# Altium PCB pcb big.PcbDoc (part 3 of 5)
Units mil, origin at the board's own origin, x right, y up, seen from the top; angles counter-clockwise.
Board outline 4068 x 10796 mil, 6 copper layers (TopLayer, MidLayer1, MidLayer2, MidLayer3, MidLayer4, BottomLayer); 521 components, 260 nets, 1284 pads, 1180 vias.
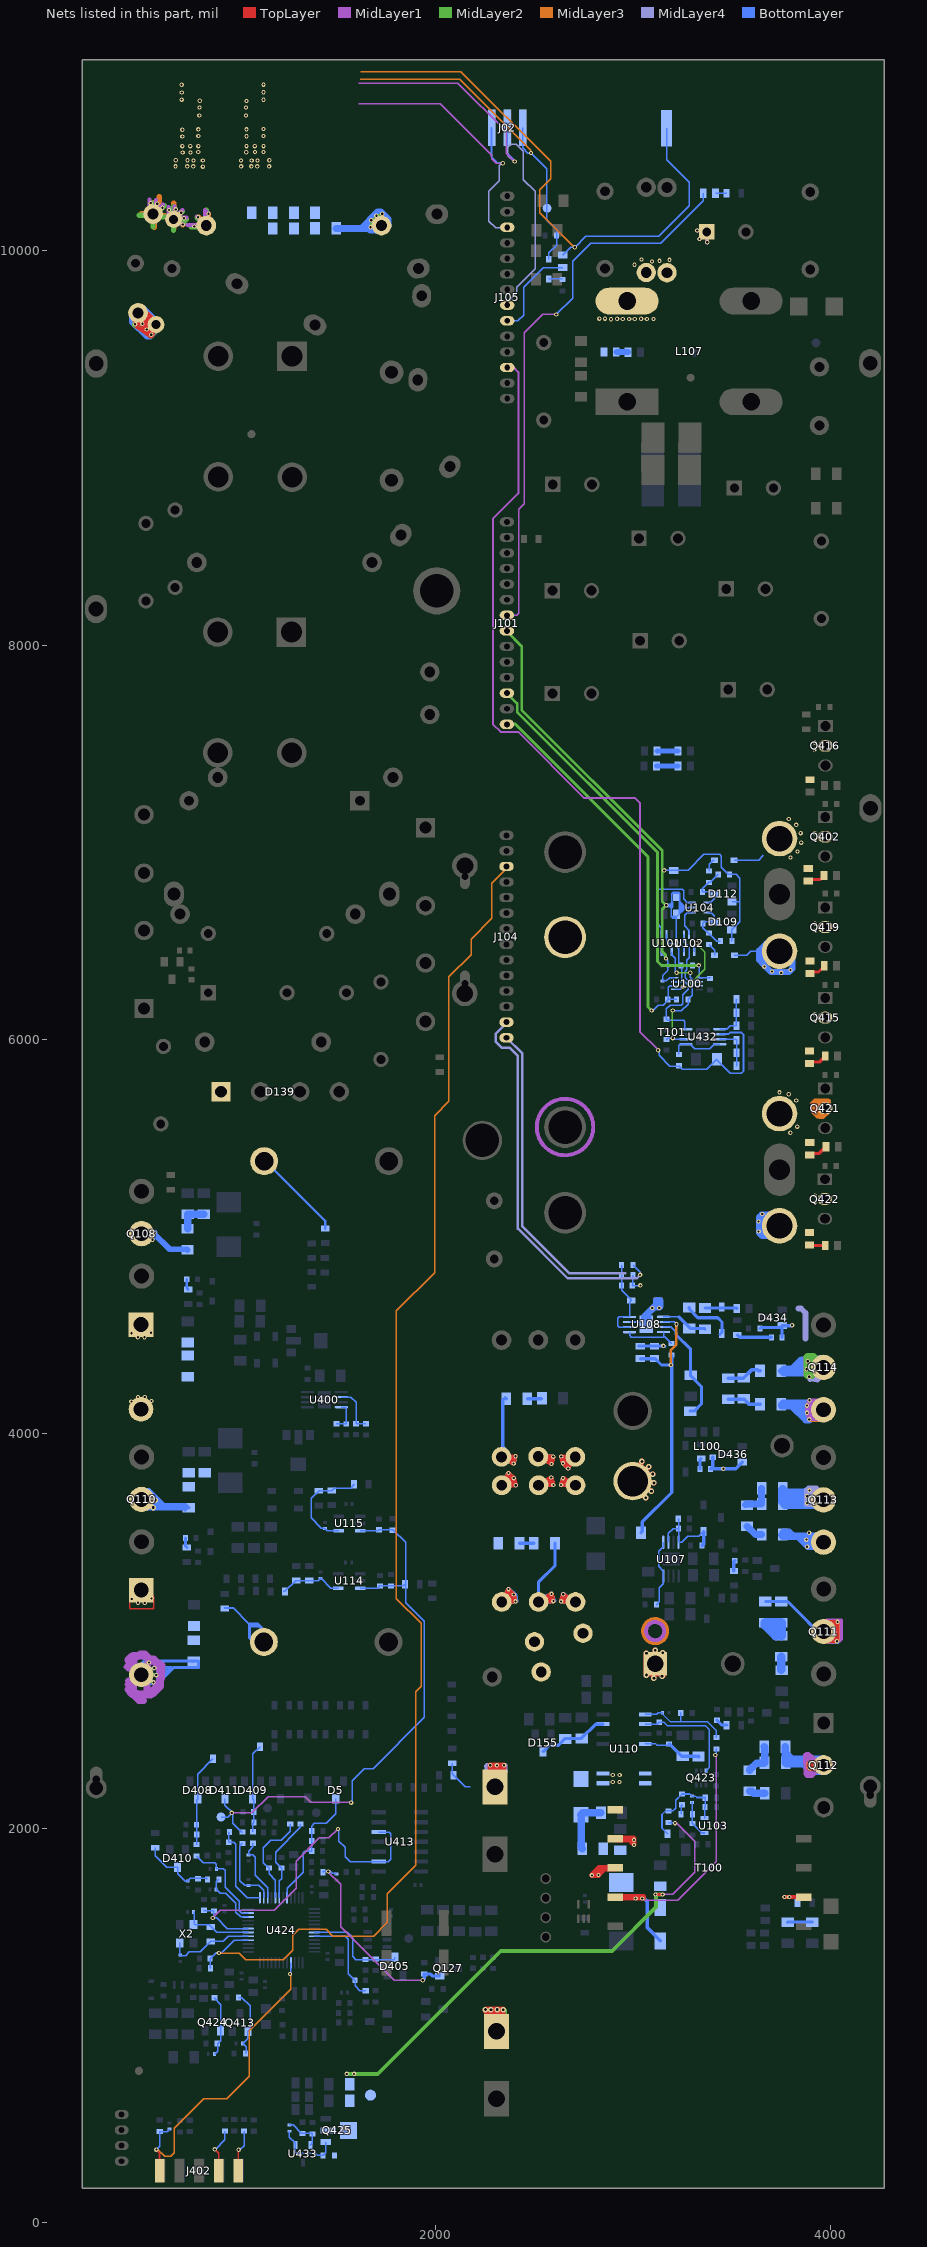
[diagram p7: the nets of this part, all layers, seen from the top]

## Via types
v1: diameter 22, hole 11, TopLayer to BottomLayer, 1101 vias
v2: diameter 28, hole 14, TopLayer to BottomLayer, 79 vias

## Nets (pads, with @x,y where several pads share a name; then routed paths per layer and width w, separated by ;. In a path a pad name is that pad's centre, name@x,y a point inside that pad or via, vN(x,y) a via of type N, cw(c..) or ccw(c..) an arc to the next point about the centre after c; other vN are vias at no path point) (continued)
UnNamedNet37: C584.1 C586.1 C587.1 D107.1 Q402.2 Q416.2 Q419.2 T101.5 T101.10 | length 813.7
  BottomLayer w7: D107.1@3513,6910 3637,6910 3661,6934
  BottomLayer w30: 3655,5024 3655,5090 3662,5097 3669,5097 3671,5095 3671,5027 3667,5023 3667,5040 3682,5055 T101.5@3743,5055 ; T101.5@3768,5082 3738,5112 3652,5112 3638,5098 3638,5020 3656,5002 3735,5002 T101.5@3782,5049
  other v1: 3637,5026 3636,5077 3655,5115 3922,6553 3923,6588 3799,6923 3834,6954 3853,6999 3923,7012 3922,7046 3850,7047 3828,7089 3790,7119 3922,7470 3923,7505
UnNamedNet38: C586.2 C5290.1 | length 91.2
  TopLayer w15: C586.2@3889,6805 3896,6812 3949,6812 C5290.1@3969,6832
UnNamedNet39: C527.1 C587.2 | length 90.9
  TopLayer w15: C587.2@3897,6335 3904,6342 3941,6342 3970,6371 C527.1@3970,6374
UnNamedNet40: C546.2 C585.1 | length 96.3
  TopLayer w15: C546.2@3895,5879 3901,5885 3944,5885 3975,5916 C585.1@3975,5917
UnNamedNet41: C528.1 C530.1 C546.1 D108.1 Q415.2 Q421.2 Q422.2 T101.7 T101.8 | length 1506.7
  MidLayer3 w20: 3910,5676 3908,5676 3924,5692 3990,5692 3993,5689 3993,5635 3964,5606 3945,5606 ; 3930,5633 3935,5628 3935,5610 3911,5634 3911,5652 3916,5647 3950,5647 3953,5644 3953,5627 3970,5644 3970,5667 3966,5663 3919,5663 3938,5644 3938,5614 3939,5615 3954,5615 3979,5640 3979,5670 3986,5677 3930,5677 3926,5673 3936,5673 3967,5642 Q421.2@3991,5642
  BottomLayer w7: D108.1@3514,6428 3576,6428 3597,6449 T101.8@3666,6449
  BottomLayer w30: 3661,6398 3661,6382 ; T101.8@3665,6407 T101.8@3665,6451 ; 3661,6382 3639,6404 3639,6452 3674,6487 3789,6487 3808,6468 3808,6359 3791,6342 3701,6342 3661,6382
  other v1: 3921,5173 3922,5209 3798,5527 3833,5558 3828,5691 3790,5722 3743,5732 3922,6094 3922,6128 3752,6338 3705,6345 3799,6353 3666,6370
UnNamedNet42: C530.2 C583.1 | length 99
  TopLayer w15: C530.2@3896,5415 3904,5423 3944,5423 3977,5456 C583.1@3978,5456
UnNamedNet43: C528.2 C582.1 | length 81.2
  TopLayer w16: C528.2@3895,4958 3898,4955 C582.1@3975,4955
UnNamedNet44: D143.2 T100.3 | length 304.1
  TopLayer w25: 2817,1771 2818,1771 2837,1790 ; T100.3@2906,1793 2857,1793 2824,1760 v1(2791,1760) 2791,1763 2828,1800 2916,1800 T100.3@2919,1797
  other v1: 2825,1762
UnNamedNet45: D129.2 R260.2 T100.4 | length 1668.3
  TopLayer w25: T100.4@2900,1652 3052,1652 3052,1646 3050,1644 2915,1644 2909,1650 T100.4@2910,1650
  MidLayer1 w7: v1(3013,1643) v1(3047,1643) 3057,1633 3226,1633 3421,1828 3421,2367 v1(3417,2371)
  BottomLayer w8: v1(3417,2371) 3423,2377 R260.2@3423,2402
  BottomLayer w18: v1(3013,1643) 3056,1643 3073,1626 3073,1494 3138,1429 D129.2@3138,1428
UnNamedNet46: R136.1 T100.7 | length 172
  TopLayer w22: v1(3768,1650) T100.7@3865,1650
  MidLayer1 w20: v1(3768,1650) v1(3793,1650)
  MidLayer2 w20: v1(3768,1650) v1(3793,1650)
  MidLayer4 w10: v1(3768,1650) v1(3793,1650)
UnNamedNet49: D144.2 T100.1 U110.5 U110.6 U110.7 U110.8
  other v1: 2897,2234 2931,2234 2897,2269 2932,2269
UnNamedNet50: C103.2 C104.2 C127.1 C133.2 C165.2 C455.2 C457.2 C547.2 CAP1.1 CAP2.1 D110.1 D139.1 D416.2 D417.2 Q113.2 Q114.2 R2.2 R108.2 R116.2 R562.2 R563.2 R5520.2 T100.2 | length 18094.4
  TopLayer w22: 2371,3183 v1(2368,3212) ; 2384,3162 2337,3142 v1(2404,3150) ; 2571,3159 2588,3186 v1(2596,3151) C133.2@2521,3147 v1(2586,3188) ; C104.2@2665,3156 v1(2646,3186) ; v1(2368,3212) v1(2395,3185) v1(2404,3150) ; v1(2368,3212) 2333,3150 2391,3185 v1(2404,3150) ; v1(2646,3186) 2702,3151 v1(2635,3150) v1(2646,3186)
  TopLayer w25: T100.2@2910,1946 2913,1949 3003,1949 3006,1946 3006,1916 2982,1940 T100.2@2915,1940
  TopLayer w28: v2(2251,1079) 2256,1081 2339,1081 2338,993 2304,971 2254,1071 2326,1064 2273,1061 2308,966 2301,1063 ; CAP1.1@2274,2196 2275,2319 2345,2318 2345,2212 2297,2222 2292,2303 2318,2302 CAP1.1@2308,2233 ; CAP2.1@2317,1026 CAP2.1@2320,1054 ; CAP1.1@2325,2292 CAP1.1@2345,2269 ; v2(3068,2776) v2(3068,2887) ; C127.1@3078,2879 C127.1@3147,2880 ; C127.1@3079,2782 C127.1@3138,2781 ; v2(3106,2760) v2(3112,2902) ; v2(3147,2770) v2(3151,2889) C127.1@3156,2778
  MidLayer1 w20: 426,2816 cw(c505,2776) 430.51,2728.12 ; 3158.23,2999 ccw(c3112,2999) 3158.23,2999
  MidLayer1 w35: 438,2703 449,2692 449,2687 459,2677 463,2677 494,2646 517,2646 ; 438,2851 439,2852 439,2856 454,2871 459,2871 464,2876 494,2876 500,2882 524,2882 547,2859 567,2859 591,2835 601,2835 610,2826 610,2794 608,2792 608,2758 602,2752 602,2718 567,2683 564,2683 555,2674 477,2674 ; 441,2746 455,2746 467,2758 467,2772 D417.2@485,2790 ; 444,2833 444,2814 441,2811 472,2811 D417.2@498,2785 ; 453,2724 453,2719 467,2705 467,2745 D417.2@501,2779 ; 469,2851 469,2813 504,2778 D417.2@505,2778 ; D417.2@500,2776 538,2814 538,2855 ; 534,2698 534,2830 v1(544,2840)
  MidLayer2 w18: 2266,1070 2266,1059 2280,1045 2340,1045 2339,1046 2339,1062 2338,1061 2265,1061 2268,1058 CAP2.1@2268,984 ; CAP2.1@2290,946 2290,955 2252,993 2252,1076 2255,1079 2348,1079 2352,1075 2352,997 CAP2.1@2322,967 ; CAP2.1@2307,969 2309,971 CAP2.1@2309,1049 ; v1(3005,1914) v1(3005,1940)
  MidLayer2 w19: v1(544,2840) D417.2@505,2778 ; v1(567,2739) D417.2@505,2778 ; v1(571,2812) D417.2@505,2778 ; v1(581,2776) D417.2@505,2778 ; 2377,3176 2365,3161 2388,3160 2370,3194 2350,3159 v1(2368,3212) ; 2586,3163 2563,3157 v1(2586,3188) ; 2648,3165 2640,3162 2685,3153 v1(2646,3186) ; v2(3068,2776) C127.1@3111,2841 ; v2(3106,2760) C127.1@3111,2841 ; v2(3147,2770) C127.1@3111,2841 ; v1(2368,3212) v1(2395,3185) v1(2404,3150) C103.2@2334,3147 2349,3182 v1(2368,3212) ; v1(2586,3188) v1(2596,3151) C133.2@2521,3147 v1(2586,3188) ; v1(2646,3186) C104.2@2708,3147 v1(2635,3150) v1(2646,3186)
  MidLayer2 w30: Q114.2@3926,4347 3926,4364 3907,4383 3907,4335 3890,4318 3913,4318 3943,4348 3943,4367 3914,4396 3886,4396 3879,4389 3879,4298 3885,4292 3907,4292 3952,4337 Q114.2@3966,4337
  MidLayer3 w18: v1(544,2840) 485,2780 v1(567,2739) ; v1(571,2812) 496,2775 v1(581,2776)
  MidLayer3 w30: 3167.95,2999 ccw(c3112,2999) 3167.95,2999
  MidLayer4 w20: v1(544,2840) D417.2@505,2778 v1(571,2812) ; v1(567,2739) 497,2776 v1(581,2776) ; v2(2251,1079) v2(2341,1078) 2348,1066 2343,935 2275,936 2254,1069 2337,1061 2267,1054 CAP2.1@2338,1039 ; 2274,2300 2334,2298 2268,2286 2263,2311 2338,2310 2348,2161 2353,2320 2260,2321 2255,2316 2256,2299 CAP1.1@2278,2175 ; 2375,3176 2356,3159 2388,3166 2368,3191 C103.2@2334,3147 ; C133.2@2554,3158 2581,3162 v1(2586,3188) ; 2646,3154 2669,3157 v1(2646,3186) ; v2(3068,2776) v2(3151,2889) ; v2(3068,2887) v2(3147,2770) ; v2(3106,2760) v2(3112,2902) ; 3907,3639 3918,3640 3902,3708 3898,3655 3913,3713 3890,3728 ; 3923,3718 Q113.2@3945,3696 ; Q113.2@3976,3683 3930,3728 3890,3728 ; Q114.2@4001,4339 3961,4388 3897,4389 3881,4378 3881,4296 3897,4274 3936,4271 ; C103.2@2334,3147 v1(2404,3150) v1(2395,3185) v1(2368,3212) C103.2@2334,3147 ; v1(2586,3188) C133.2@2521,3147 v1(2596,3151) v1(2586,3188) ; v1(2646,3186) v1(2635,3150) C104.2@2708,3147 v1(2646,3186) ; 3890,3728 v1(3882,3649) 3962,3698 3951,3634 3876,3638 3876,3717 3890,3728 ; 3936,4271 3912,4303 3900,4353 3918,4382 3896,4380 3893,4307 3913,4283 4013,4343 3936,4271
  BottomLayer w7: R116.2@2083,2329 2083,2275 2144,2214 2149,2209 2175,2209
  BottomLayer w10: v2(3106,2760) v2@3112,2766
  BottomLayer w16: D417.2@512,2774 505,2781 505,2806 511,2812 511,2804 505,2798 505,2769 519,2755 519,2749 522,2752 522,2834 491,2803 491,2764 514,2741 521,2741 528,2748 528,2840 ; 587,2740 587,2800 601,2814 659,2814 603,2758 591,2758 602,2769 602,2802 632,2802 613,2783 613,2792 616,2795 ; C455.2@763,2845 765,2847 796,2847 796,2816 794,2814 668,2814 588,2734 504,2734 481,2757 481,2807 522,2848 769,2848 C455.2@771,2846 ; C133.2@2529,3143 2520,3152 2520,3246 2604,3330 R2.2@2604,3445 ; v2(3068,2776) v2(3068,2887) ; v2@3112,2766 v2(3112,2902) ; C127.1@3151,2774 v2(3151,2889)
  BottomLayer w18: C103.2@2356,3165 2377,3165 2380,3199 2344,3154 2398,3162 2372,3212 2406,3183 2411,3150 2328,3144 v1(2368,3212) ; 2580,3169 2571,3170 2532,3155 2583,3154 2583,3186 2526,3167 2538,3141 2600,3150 v1(2586,3188) v1@2602,3154 ; 2652,3150 2651,3172 C104.2@2679,3150 ; v1(2635,3150) v1(2646,3186) 2654,3186 2693,3147 C104.2@2708,3147 2705,3150 v1(2635,3150)
  BottomLayer w30: 3816,4325 3892,4325 3909,4308 Q114.2@3958,4308 ; 3827,4343 3938,4343 Q114.2@3957,4324 ; 3850,4355 3929,4355 Q114.2@3934,4360 ; Q114.2@3909,4327 Q114.2@3957,4327 ; Q114.2@3966,4310 3944,4288 3899,4288 3882,4305 3765,4305 C165.2@3751,4319 3753,4319 3766,4332 3808,4332 3854,4378 3934,4378 Q114.2@3968,4344
  BottomLayer w35: 3767,3678 3891,3678 3900,3687 3914,3687 3942,3659 3913,3659 3912,3660 R562.2@3768,3660 ; Q113.2@3960,3663 3955,3663 3912,3706 3777,3706 R563.2@3759,3724 3752,3717 3752,3654 3771,3635 3958,3635 Q113.2@3966,3643
  other v1: 2309,2318 2276,2319 2346,2319 3882,3683 3895,3713 455,4164 557,4166 489,4187 523,4187 3894,4289 3880,4327 3886,4368
  other v2: 2279,1078 2311,1079
UnNamedNet51: C427.2 J402.5 R456.2 U424.40 | length 1661.9
  TopLayer w8: v1(582,369) 582,367 598,351 J402.5@598,261
  MidLayer3 w7: v1(582,369) 590,369 625,334 655,334 673,352 673,478 822,627 938,627 1052,741 1052,971 1263,1182 1263,1257 v1(1260,1260)
  BottomLayer w7: v1(582,369) 599,386 R456.2@599,461 600,460 636,460 C427.2@649,473 ; v1(1260,1260) 1264.48,1264.48 U424.40@1264.48,1316
UnNamedNet53: J402.2 R466.2 | length 234.2
  TopLayer w8: v1(878,370) 898,350 J402.2@898,261
  BottomLayer w7: v1(878,370) 882,370 930,418 R466.2@930,463
UnNamedNet54: J402.1 R467.2 | length 218.1
  TopLayer w8: J402.1@998,261 998,367 v1(999,368)
  BottomLayer w7: v1(999,368) 1006,368 1027,389 R467.2@1027,463
UnNamedNet55: C107.2 C112.1 C115.2 C122.2 C150.1 D109.2 D112.2 J101.7 R100.2 R102.2 U100.8 U101.5 U102.5 U104.5 | length 4177.4
  MidLayer2 w14: J101.7@2360,8073 2360,8070 2435,7995 2435,7671 3148,6958 3148,6701 v1(3168,6681) 3148,6661 3148,6446 3164,6430 3164,6414 v1(3167,6411)
  BottomLayer w7: C112.1@3150,6297 3169,6297 3185.06,6313.06 U100.8@3211,6313.06 ; v1(3158,6858) 3159,6859 3279,6859 3359,6939 3439,6939 3448,6930 3448,6874 3484,6838 3523,6838 3542,6819 3542,6598 D109.2@3501,6557 R102.2@3501,6499 ; D112.2@3502,6699 3538,6699
  BottomLayer w8: U101.5@3144,6446 3144,6436 3177,6403 3177,6352 3150,6325 C112.1@3150,6297 ; v1@3173,6679 3196,6679 ; 3188,6682 3189,6682 3202,6695 3202,6673 3195,6666 3195,6669 3197,6671 3197,6675 3197,6685 3192,6680 3192,6672 ; C122.2@3202,6742 C122.2@3233,6742 ; C115.2@3215,6616 3200,6616 3193,6623 3193,6667 3187,6673 3175,6673 3168,6680 v1(3168,6681) 3172,6685 3185,6685 3197,6697 3197,6741 3203,6747 3232,6747 3236,6743 3236,6702 3269,6669 U104.5@3288,6669 ; C115.2@3217,6623 3202,6623 3201,6622 3204,6625 C115.2@3219,6625 ; C115.2@3235,6640 3235,6699 ; 3240,6693 3240,6644 3239,6643 3239,6645 3246,6652 ; 3256,6671 3254,6671 3247,6664 3247,6678 3248,6679 3249,6679 3262,6666 3256,6666 3245,6655 3245,6667 3244,6668 3244,6690 3263,6671 3263,6670 ; U102.5@3258,6445 3258,6465 3220,6503 3220,6621 3268,6669 U104.5@3300,6669
UnNamedNet56: C126.2 D112.3 R100.1 R106.2 U104.1 | length 258.5
  BottomLayer w7: U104.1@3378,6694 3392,6694 3411,6713 3411,6737 D112.3@3413,6739 3403,6749 C126.2@3352,6749 3352,6764 3385,6797 3391,6797 R100.1@3432,6838
UnNamedNet57: C130.2 D109.3 R102.1 R112.1 U104.3 | length 272.1
  BottomLayer w7: U104.3@3378,6644 3396,6644 3412,6628 D109.3@3412,6597 3362,6597 C130.2@3354,6589 3354,6567 3381,6540 3384,6540 3425,6499 R102.1@3443,6499
UnNamedNet58: C117.2 C118.1 | length 110
  BottomLayer w25: C117.2@3119,7387 C118.1@3229,7387
UnNamedNet59: C138.2 C139.1 | length 108
  BottomLayer w25: C138.2@3121,7464 C139.1@3229,7464
UnNamedNet60: C131.2 C140.1 | length 60.4
  BottomLayer w30: C131.2@2915,9488 2916,9487 C140.1@2975,9487
UnNamedNet61: C131.1 C232.1 F100.2 F101.2 L107.4 | length 306.3
  MidLayer1 w20: v1(3326,10104) C232.1@3374,10097 ; v1(3337,10061) C232.1@3374,10097 ; v1(3376,10044) C232.1@3374,10097
  MidLayer3 w18: v1(3326,10104) C232.1@3374,10097 ; v1(3337,10061) C232.1@3374,10097 ; v1(3376,10044) C232.1@3374,10097
  other v1: 2888,9654 2948,9655 2980,9655 3009,9655 3070,9655 3104,9655 2919,9656 3041,9656 2829,9657 2858,9657 3007,9930 3096,9947 3134,9950 3185,9955 3043,9957
UnNamedNet62: J105.6 LB100.2 | length 475.4
  BottomLayer w7: J105.6@2362,9646 2416,9646 2445,9675 2445,9816 2545,9916 LB100.2@2643,9916
UnNamedNet63: LB100.1 Y.1 | length 2872.9
  MidLayer3 w7: 1618,10910 2127,10910 2582,10455 2582,10366 2527,10311 2527,10194 2702,10019 v1(2704,10019)
  BottomLayer w7: LB100.1@2643,9979 2683,10019 2706,10019 2761,10074 3130,10074 3285,10229 3285,10349 3170,10464 Y.1@3170,10623
UnNamedNet64: J101.8 LB115.1 | length 2830
  MidLayer1 w7: J101.8@2360,8152 2410,8152 2420,8162 2420,8689 2449,8718 2449,9584 2543,9678 v1(2610,9678)
  BottomLayer w7: v1(2610,9678) 2611,9678 2694,9761 2694,9947 2786,10039 3140,10039 3356,10255 LB115.1@3356,10293
UnNamedNet65: LB115.2 RT404.1 | length 56.4
  BottomLayer w7: LB115.2@3419,10293 3474,10293 RT404.1@3475,10292
UnNamedNet66: J02.3 J105.12 | length 1517.8
  MidLayer1 w7: 1609,10747 1628,10747 2021,10747 2282,10486 2282,10468 2305,10445 v1(2339,10445)
  MidLayer4 w7: v1(2339,10445) 2334,10445 2321,10432 2321,10357 2268,10304 2268,10152 2303,10117 2359,10117 J105.12@2362,10120
  BottomLayer w9: J02.3@2282,10625 2282,10479 2315,10446 2338,10446 v1(2339,10445)
UnNamedNet67: J02.2 J105.7 | length 2260.6
  MidLayer1 w7: 1609,10852 1668,10852 2112,10852 2357,10607 2357,10495 2398,10454 v1(2400,10454)
  MidLayer4 w7: J105.7@2362,9725 2362,9740 2409,9787 2409,9816 2503,9910 2503,10302 2444,10361 2444,10505 2408,10541 2379,10541 2365,10527 2365,10484 2395,10454 v1(2400,10454)
  BottomLayer w7: J02.2@2361,10624 2361,10497 2400,10458 v1(2400,10454)
UnNamedNet68: D102.2 J02.1 R142.2 TP3.1 | length 1792.9
  MidLayer3 w7: 1615,10871 2121,10871 2482,10510 v1(2482,10497)
  BottomLayer w7: J02.1@2441,10624 2441,10523 2467,10497 2484,10497 2563,10418 2563,10156 2612,10107 2612,10030 2572,9990 D102.2@2572,9958
UnNamedNet69: C128.2 C207.1 F103.1 R253.2 | length 6186.2
  TopLayer w22: F103.1@506,9712 591,9630 554,9566 487,9614 463,9671 495,9707 581,9625 550,9584 497,9637 484,9674 497,9689 565,9623 547,9600 500,9672 C207.1@550,9617
  MidLayer2 w15: F103.1@471,9682 466,9621 512,9596 551,9563 578,9588 588,9640 549,9576 565,9586 578,9648 542,9583 v1(474,9628) 479,9688 504,9690 565,9643 543,9594 485,9633 488,9680 500,9678 548,9640 537,9603 493,9640 497,9674 555,9638 531,9620 505,9642 506,9657 541,9636 536,9629 521,9642 ; F103.1@508,9698 529,9683 543,9665 C207.1@600,9642 ; C128.2@1724,10129 1717,10174 1696,10160 v1(1668,10120) 1674,10137 1680,10159 1708,10180 v1(1728,10189)
  MidLayer3 w18: C207.1@566,9629 558,9645 558,9604 579,9637 533,9668 511,9681 526,9640 524,9619 498,9652 521,9640 536,9671 547,9597 493,9683 489,9636 558,9583 592,9643 588,9606 560,9567 549,9575 530,9588 517,9603 v1(474,9628) 478,9681 513,9703 545,9675 C207.1@594,9642 ; v1(1672,10156) C128.2@1724,10129 v1(1728,10189)
  BottomLayer w16: F103.1@450,9692 450,9639 530,9559 554,9559 594,9599 594,9641 516,9719 475,9719 F103.1@453,9697 ; F103.1@460,9694 460,9644 532,9572 555,9572 584,9601 584,9634 512,9706 476,9706 471,9701 471,9650 542,9579 550,9579 577,9606 577,9626 508,9695 F103.1@484,9695 ; F103.1@480,9688 480,9658 541,9597 543,9597 547,9593 550,9593 567,9610 567,9625 507,9685 491,9685 489,9683 489,9666 550,9605 550,9612 556,9618 553,9618 F103.1@492,9679
  BottomLayer w35: R253.2@1494,10115 1622,10115 1704,10197 1722,10197 1757,10162 1757,10127 1735,10105 1668,10105 1658,10115 1609,10115 ; v1@1667,10127 1668,10127 1710,10169 1732,10147 1732,10132 1727,10127 1704,10127 C128.2@1699,10132
  other v1: 556,9575 533,9602 511,9631 1698,10179 1012,10429 1064,10429 1094,10429 1154,10429 1011,10459 1065,10459 1095,10459 1155,10460 1038,10501 1082,10502 1125,10502 1039,10532 1081,10532 1125,10532 1039,10582 1125,10583 1039,10617 1125,10619 1037,10687 1037,10728 1039,10761 1125,10767 1125,10805 1125,10844
UnNamedNet70: R253.1 R254.2
UnNamedNet71: R254.1 R255.2
UnNamedNet72: C128.1 C300.2 F102.1 R252.1 | length 3223.2
  MidLayer1 w20: 546,10261 546,10214 565,10195 F102.1@565,10187 ; 581,10258 581,10203 F102.1@565,10187 ; 615,10236 566,10187 F102.1@565,10187 ; 644,10224 644,10186.17 C300.2@669.54,10160.64 ; 674,10226 674,10165.1 C300.2@669.54,10160.64 ; 714,10209 669.54,10164.54 C300.2@669.54,10160.64 ; v1@716,10136 714,10138 692.18,10138 C300.2@669.54,10160.64 ; 734,10169 677.9,10169 C300.2@669.54,10160.64 ; 739,10132 822,10132 C128.1@833,10121 ; v1@788,10174 833,10129 C128.1@835,10129 836,10130 836,10201 828,10209 C128.1@828,10128
  MidLayer2 w26: 494,10181 F102.1@566,10181 ; v1@553,10247 553,10194 F102.1@566,10181 ; 565,10122 F102.1@565,10187 ; F102.1@565,10190 565,10191 576,10202 576,10246 ; F102.1@578,10186 579,10186 624,10231 ; v1@647,10214 669.54,10191.46 C300.2@669.54,10149 ; C300.2@668,10149 715,10149 v1@725,10139 ; 669.54,10103.1 C300.2@669.54,10160.64 ; 669.54,10226.46 C300.2@669.54,10160.64 ; v1@713,10200 673.64,10160.64 C300.2@669.54,10160.64 ; 735.64,10160.64 C300.2@669.54,10160.64 ; 757,10122 839,10122 836,10122 v1@788,10170 ; v1@765,10129 819,10129 C128.1@826,10122 ; C128.1@835,10129 835,10208 ; F102.1@566,10181 566,10187 580,10173 657.18,10173 C300.2@669.54,10160.64
  MidLayer3 w28: 506.49,10189 563,10189 F102.1@573,10179 ; 565,10244 F102.1@565,10187 ; 570,10120 570,10182 F102.1@565,10187 ; F102.1@574,10228 597,10251 597,10275 ; 669.54,10115.46 C300.2@669.54,10160.64 ; 669.54,10241.54 C300.2@669.54,10160.64 ; C300.2@680,10160.64 642.36,10160.64 624,10179 F102.1@573,10179 ; v1(716,10134) 716,10146 ; 733.36,10160.64 C300.2@669.54,10160.64 ; 762,10128 C128.1@848,10128 ; v1@797,10171 835,10133 C128.1@835,10129 846,10140 v1(846,10189) ; F102.1@565,10187 F102.1@573,10179
  MidLayer4 w20: v1(646,10208) C300.2@669.54,10160.64 ; C300.2@659,10157 v1(716,10134) ; v1(680,10211) C300.2@669.54,10160.64 ; v1(722,10166) C300.2@669.54,10160.64 ; v1@766,10124 C128.1@835,10129 ; v1(793,10171) C128.1@835,10129 ; v1(846,10189) C128.1@835,10129
  other v1: 774,10124 708,10194 613,10219 586,10240 553,10243 818,10428 679,10429 739,10429 769,10429 770,10459 818,10459 680,10460 740,10460 715,10500 755,10500 794,10502 714,10532 754,10532 795,10532 714,10581 795,10583 714,10615 795,10617 800,10687 801,10728 802,10762 710,10768 711,10804 710,10843
UnNamedNet73: R252.2 R255.1
UnNamedNet74: D102.1 R107.1 | length 68
  BottomLayer w7: D102.1@2572,9858 R107.1@2640,9858
UnNamedNet75: D107.2 R106.1 | length 69.7
  BottomLayer w7: R106.1@3386,6855 3386,6889 3407,6910 D107.2@3413,6910
UnNamedNet76: U102.2 U104.4 | length 152.9
  BottomLayer w7: U102.2@3284,6532 3284,6553 3261,6576 3261,6631 3274,6644 U104.4@3300,6644
UnNamedNet77: U101.1 U104.6 | length 467.3
  BottomLayer w7: U101.1@3144,6533 3144,6567 3119,6592 3119,6752 3129,6762 3249,6762 3256,6755 3256,6713 3275,6694 U104.6@3300,6694
UnNamedNet78: D108.2 R112.2 | length 65.6
  BottomLayer w7: R112.2@3386,6482 3386,6480 3414,6452 D108.2@3414,6428
UnNamedNet79: U100.5 U102.4 | length 394.6
  MidLayer2 w8: v1(3252,6267) 3275,6267 3364,6356 3364,6444 3323,6485 v1(3323,6489)
  BottomLayer w7: U100.5@3211,6254 3239,6254 v1(3252,6267) ; U102.4@3310,6445 3310,6476 v1(3323,6489)
UnNamedNet80: C536.1 R145.2 U100.3 U102.1 U432.2 | length 768.9
  MidLayer2 w8: v1(3201,6007) 3199,6009 3199,6145 v1(3201,6147)
  BottomLayer w7: C536.1@3169,6000 3176,6007 v1(3201,6007) 3206.41,6001.59 U432.2@3268,6001.59 ; v1(3201,6147) 3202,6146 3245,6146 3279,6180 R145.2@3279,6204 3280,6204 3300,6224 3300,6280 3266,6314 3266,6347 3272,6353 3272,6402 3286,6416 3286,6469 3258,6497 U102.1@3258,6532 ; 3301.63,6273.63 3306.37,6273.63 U100.3@3337,6273.63
UnNamedNet81: C537.1 R149.1 U100.7 U101.2 U432.4 | length 752.4
  BottomLayer w7: U100.7@3211,6293.37 3262.63,6293.37 3280,6276 3280,6256 3251,6227 3251,6182 3244,6175 3188,6175 3169,6156 C537.1@3169,6103 3175,6097 3257,6097 3263,6091 3263,6057.77 U432.4@3268,6052.77 ; R149.1@3243,6375 3248,6370 3248,6295.37
  BottomLayer w8: U101.2@3170,6533 3170,6497 3181,6486 3207,6486 3232,6461 3232,6386 R149.1@3243,6375
UnNamedNet82: U100.2 U101.4 | length 266.6
  MidLayer2 w8: v1(3221,6339) 3222,6338 3289,6338 v1(3290,6339)
  BottomLayer w7: U101.4@3196,6446 3196,6431 3215,6412 3215,6345 v1(3221,6339) ; v1(3290,6339) 3291,6338 3291,6315 3312.68,6293.32 U100.2@3337,6293.32
UnNamedNet83: J101.3 R117.1 R149.2 U100.1 | length 2047.9
  MidLayer2 w14: J101.3@2360,7757 2360,7756 2412,7704 2412,7662 3124,6950 3124,6396 3145,6375 3332,6375 v1(3333,6376)
  BottomLayer w7: R149.2@3301,6375 3302,6376 v1(3333,6376) 3337,6372 U100.1@3337,6313 3388,6313 R117.1@3391,6310
UnNamedNet84: J101.1 R129.2 R145.1 U100.6 | length 2034
  MidLayer2 w15: J101.1@2360,7599 2361,7600 2403,7600 3076,6927 3076,6165 v1(3094,6147)
  BottomLayer w7: v1(3094,6147) 3099,6147 3127,6175 3152,6175 3176,6199 R129.2@3176,6204 ; U100.6@3211,6273.68 3187.68,6273.68 3179,6265 3179,6207 R129.2@3176,6204 ; R145.1@3221,6204 R129.2@3176,6204
UnNamedNet85: R513.1 R514.1 R519.1 U432.5 | length 226.3
  BottomLayer w7: U432.5@3440,6053 3475,6053 3493,6071 3523,6071 R514.1@3524,6070 3524,6203 R519.1@3525,6204
UnNamedNet86: R512.1 R515.1 R518.1 U432.7 | length 218.4
  BottomLayer w7: U432.7@3440,6001.82 3520.18,6001.82 R518.1@3525,5997 3525,5867 R512.1@3524,5866
UnNamedNet87: R557.1 U432.1 U432.8 | length 272.5
  BottomLayer w7: R557.1@3233,5925 3233,5968 3241,5976 3291,5976 3314,5953 3388,5953 3411.23,5976.23 U432.8@3440,5976.23
UnNamedNet88: C508.2 J105.3 R557.2 U432.6 | length 4976
  MidLayer1 w10: J105.3@2354,9412 2391,9412 2418,9385 2418,8770 2289,8641 2289,7600 2328,7561 2417,7561 2753,7225 3011,7225 3035,7201 3035,6039 3127,5947 v1(3127,5946)
  BottomLayer w7: v1(3127,5946) 3132,5941 3132,5920 3187,5865 R557.2@3237,5865 ; R557.2@3233,5867 3250,5850 3375,5850 3425,5900 3425,5898 3494,5829 3549,5829
  BottomLayer w9: U432.6@3440,6027.41 3484.41,6027.41 3492,6035 3550,6035 3560,6025 3560,5840 3549,5829
UnNamedNet89: C110.1 D137.1 R193.2 R280.1 U107.2 U107.4 | length 449.9
  BottomLayer w7: U107.2@3179.59,3450 3179.59,3494.59 3204,3519 C110.1@3231,3519 ; R280.1@3229,3569 3231,3567 C110.1@3231,3519 ; D137.1@3358,3504 3357,3504 3333,3480 3277,3480 3247,3450 U107.4@3230.77,3450 3230.77,3518.77 C110.1@3231,3519
  BottomLayer w18: R193.2@3350,3433 3358,3441 D137.1@3358,3504
UnNamedNet90: C102.2 C103.1 C104.1 C105.2 C133.1 C134.2 D110.2 D111.1 R3.1 R4.1 T101.2 | length 6137.6
  TopLayer w22: C103.1@2372,3766 2376,3784 2387,3747 2352,3751 v1(2368,3801) ; C105.2@2379,3870 v1(2404,3886) ; C134.2@2550,3879 2577,3864 ; C133.1@2570,3748 v1(2585,3778) ; 2654,3867 2687,3877 2667,3849 v1(2636,3885) ; C104.1@2662,3748 2647,3753 v1(2645,3775) ; v1(2368,3801) v1(2395,3775) v1(2405,3739) C103.1@2334,3739 v1(2368,3801) ; v1(2404,3886) v1(2394,3849) C105.2@2333,3883 v1(2404,3886) ; v1(2585,3778) v1(2596,3740) C133.1@2521,3739 v1(2585,3778) ; v1(2636,3885) C102.2@2707,3883 v1(2671,3824) v1(2645,3850) v1(2636,3885) ; v1(2645,3775) v1(2635,3740) C104.1@2708,3739 v1(2645,3775) ; C134.2@2519,3884 v1(2595,3884) v1(2586,3847) C134.2@2519,3884
  MidLayer1 w20: 2798.06,5556 ccw(c2655,5556) 2798.06,5556
  MidLayer2 w19: C103.1@2372,3758 2371,3747 2349,3752 2373,3777 2387,3745 v1(2368,3801) ; 2391,3870 C105.2@2333,3883 ; 2578,3866 2554,3873 v1(2595,3884) ; 2584,3754 2547,3746 v1(2585,3778) ; C102.2@2681,3854 2660,3872 2688,3876 2669,3842 v1(2636,3885) ; C104.1@2684,3751 2647,3754 v1(2645,3775) ; C105.2@2333,3883 v1(2404,3886) v1(2394,3849) C105.2@2333,3883 ; v1(2368,3801) v1(2395,3775) v1(2405,3739) C103.1@2334,3739 v1(2368,3801) ; v1(2585,3778) v1(2596,3740) C133.1@2521,3739 v1(2585,3778) ; v1(2595,3884) v1(2586,3847) C134.2@2519,3884 v1(2595,3884) ; v1(2636,3885) C102.2@2707,3883 v1(2671,3824) v1(2645,3850) v1(2636,3885) ; v1(2645,3775) C104.1@2708,3739 v1(2635,3740) v1(2645,3775)
  MidLayer4 w20: C105.2@2370,3877 2384,3865 v1(2404,3886) ; C103.1@2372,3751 2372,3779 2393,3751 2355,3751 v1(2368,3801) ; C133.1@2555,3750 2580,3753 v1(2585,3778) ; 2582,3860 2559,3869 v1(2595,3884) ; 2652,3748 2665,3750 v1(2645,3775) ; 2657,3871 2684,3873 2667,3849 v1(2636,3885) ; v1(2368,3801) v1(2395,3775) v1(2405,3739) C103.1@2334,3739 v1(2368,3801) ; v1(2404,3886) C105.2@2333,3883 v1(2394,3849) v1(2404,3886) ; v1(2585,3778) C133.1@2521,3739 v1(2596,3740) v1(2585,3778) ; v1(2595,3884) v1(2586,3847) C134.2@2519,3884 v1(2595,3884) ; v1(2636,3885) v1(2645,3850) v1(2671,3824) C102.2@2707,3883 v1(2636,3885) ; v1(2645,3775) v1(2635,3740) C104.1@2708,3739 v1(2645,3775)
  BottomLayer w16: C105.2@2355,3919 2339,3935 2339,4172 2351,4184 R4.1@2357,4178
UnNamedNet91: R2.1 R3.2 | length 73
  BottomLayer w16: R3.2@2424,3445 R2.1@2497,3445
UnNamedNet92: R4.2 R5.1 | length 72
  BottomLayer w16: R4.2@2464,4178 R5.1@2536,4178
UnNamedNet93: C146.1 R574.2 R575.2 | length 154.8
  BottomLayer w38: C146.1@740,5040 742,5042 R574.2@742,5113 R575.2@823,5113
UnNamedNet94: C146.2 D416.1 L103.1 Q108.2 R299.1 | length 809.7
  BottomLayer w11: L103.1@1129,5383 L103.1@1136,5383
  BottomLayer w12: L103.1@1136,5383 1438,5081 R299.1@1438,5041
  BottomLayer w30: Q108.2@562,4993 540,5015 Q108.2@507,5015 513,5021 v1(572,5021) ; Q108.2@570,5015 649,4936 737,4936 C146.2@740,4933
  other v1: 488,4490 522,4490 455,4510 555,4513 562,4984
UnNamedNet95: C167.1 R235.1 | length 53.9
  BottomLayer w15: C167.1@736,4784 736,4740 R235.1@743,4733
UnNamedNet96: C457.1 C458.2
UnNamedNet97: C411.1 R131.1 U400.2 | length 244.4
  BottomLayer w7: U400.2@1520,4186.41 1567.59,4186.41 1595,4159 C411.1@1595,4051 R131.1@1645,4051
UnNamedNet98: C410.1 R132.1 U400.4 | length 159
  BottomLayer w7: R132.1@1495,4051 1543,4051 C410.1@1545,4049 1545,4130 1539.77,4135.23 U400.4@1520,4135.23
UnNamedNet99: C142.2 D417.1 J005.1 Q110.2 R297.2 | length 2736.4
  TopLayer w8: D417.1@461,3204 447,3190 447,3116 450,3113 563,3113 568,3118 568,3173 D417.1@536,3205
  MidLayer1 w20: v1(457,3162) D417.1@505,3207 ; v1(558,3165) D417.1@505,3207 ; D417.1@505,3207 v1(523,3142) D417.1@505,3207 ; D417.1@505,3207 v1(489,3143) D417.1@505,3207
  MidLayer4 w14: v2(566,3626) 545,3626 507,3664 v2(576,3664)
  BottomLayer w10: R297.2@927,3117 971,3117 1051,3037 ; 1056,3030 1095,3030 J005.1@1135,2990 ; 1057,3032 1057,2967 J005.1@1072,2952 ; 1061,3023 1096,3023 ; J005.1@1127,2944 1073,2944 1051,2966 1051,3037 ; J005.1@1142,2951 1142,2993 1098,3037 1051,3037
  BottomLayer w16: Q110.2@507,3685 507,3705 510,3702 541,3702 607,3636 617,3636 ; Q110.2@559,3669 566,3669 606,3629 C142.2@727,3629 ; Q110.2@564,3658 564,3657 590,3631 577,3644 561,3644 556,3639 556,3649 567,3660 559,3660 545,3646 545,3631 597,3631 ; C142.2@739,3625 727,3613 721,3619 491,3619 475,3635 475,3684 507,3716 546,3716 621,3641 731,3641 C142.2@747,3625
UnNamedNet100: C142.1 R576.2 R577.2
UnNamedNet101: C169.1 R237.1 | length 52.3
  BottomLayer w16: C169.1@729,3472 729,3431 R237.1@737,3423
UnNamedNet102: C256.2 R244.1 R245.1 R303.1 U115.4 | length 512.3
  BottomLayer w7: U115.4@1506,3508 1448,3508 1434,3522 1418,3522 1367,3573 1367,3672 1407,3712 1471,3712 1484,3725 1567,3725 R303.1@1585,3743
UnNamedNet103: C212.2 C215.2 D411.3 R135.2 R182.2 R472.1 R521.1 TP5.1 U114.3 U115.3 | length 2958.1
  MidLayer1 w7: v1(964,2077) 1067,2077 1149,2159 1337,2159 1365,2131 1568,2131 v1(1570,2129)
  BottomLayer w7: TP5.1@910,2056 945,2056 964,2075 v1(964,2077) ; D411.3@930,2148 930,2117 969,2078 969,2025 1014,1980 R472.1@1018,1980 ; v1(1570,2129) 1576,2135 1576,2241 1637,2302 1683,2302 1942,2561 1942,3048 1847,3143 1847,3449 1782,3514 C212.2@1712,3514 ; U114.3@1616,3217 1705,3217 C215.2@1716,3228 1834,3228 R521.1@1844,3238 ; U115.3@1617,3508 1706,3508 C212.2@1711,3513
UnNamedNet104: C255.2 R242.2 R243.2 R294.2 U114.4 | length 326.2
  BottomLayer w7: R294.2@1226,3201 1234,3201 1288,3255 1404,3255 C255.2@1415,3266 1418,3266 1467,3217 U114.4@1505,3217
UnNamedNet105: C455.1 C456.2
UnNamedNet106: C210.2 D408.3 R122.1 R196.2 R230.1 | length 470.4
  BottomLayer w7: R230.1@786,1916 786,2142 791,2147 791,2273 869,2351 R122.1@869,2352
UnNamedNet107: C132.2 R551.2 U424.13 | length 454.8
  BottomLayer w7: R551.2@952,1980 949,1977 C132.2@949,1928 950,1929 975,1929 985,1919 985,1704 1043,1646 U424.13@1107,1646
UnNamedNet108: C401.2 R230.2 U424.11 | length 473.4
  BottomLayer w7: R230.2@786,1858 819,1825 877,1825 886,1816 C401.2@886,1793 887,1794 922,1794 931,1785 931,1701 1003,1629 1003,1581 1015.15,1568.85 U424.11@1048,1568.85
UnNamedNet109: C405.1 D410.3 R427.1 R473.1 R520.2 | length 386.9
  BottomLayer w7: R520.2@577,1900 577,1859 634,1802 D410.3@690,1802 690,1769 729,1730 738,1730 754,1746 835,1746 R473.1@841,1740
UnNamedNet110: C400.2 R473.2 U424.10 | length 305.3
  BottomLayer w7: R473.2@899,1740 886,1727 886,1689 C400.2@885,1688 887,1688 905,1670 934,1670 985,1619 985,1573 1008.83,1549.17 U424.10@1048,1549.17
UnNamedNet111: C420.2 R475.2 U413.2 U413.5 U424.7 | length 1791.7
  MidLayer1 w7: v1(868,1544) 868,1546 905,1583 1179,1583 1291,1695 1291,1832 1409,1950 1457,1950 1502,1995 v1(1503,1995)
  BottomLayer w7: C420.2@823,1583 826,1580 R475.2@874,1580 873,1579 873,1549 v1(868,1544) 888,1544 941.89,1490.11 U424.7@1048,1490.11 ; v1(1503,1995) 1508,1990 1508,1934 1540,1902 1540,1855 1565,1830 U413.2@1710,1830 1758,1830 1771,1843 1771,1972 1763,1980 U413.5@1710,1980
UnNamedNet112: C555.2 R561.1 U424.6 X2.3 | length 354.3
  BottomLayer w7: C555.2@771,1575 774,1572 774,1514 778,1510 849,1510 888.57,1470.43 U424.6@1048,1470.43
UnNamedNet113: C424.2 R472.2 U424.14 | length 374.6
  BottomLayer w7: R472.2@1018,1922 1005,1909 1005,1734 1029,1710 1102,1710 1126.69,1685.31 U424.14@1126.69,1646
UnNamedNet114: C425.1 R222.2 U424.15 | length 338.9
  BottomLayer w7: R222.2@1072,1923 1072,1905 1050,1883 C425.1@1050,1864 1072,1864 1083,1853 1083,1761 1146.37,1697.63 U424.15@1146.37,1646
UnNamedNet115: C211.2 D409.3 R127.1 R167.2 R222.1 | length 449.6
  BottomLayer w7: R222.1@1072,1981 1072,2023 R167.2@1077,2028 1077,2081 C211.2@1076,2082 1076,2142 1072,2146 1072,2376 1107,2411 R127.1@1107,2412
UnNamedNet116: C511.2 R496.2 U424.17 | length 486.8
  BottomLayer w7: U424.17@1185.74,1646 1185.74,1735.26 1154,1767 1154,1795 1124,1825 1124,1899 1163,1938 1215,1938 1261,1984 R496.2@1261,2020
UnNamedNet117: C510.2 R499.2 U424.18 | length 443.4
  BottomLayer w7: U424.18@1205.43,1646 1205.43,1732.43 1217,1744 C510.2@1217,1797 1187,1827 1187,1878 1313,2004 R499.2@1313,2020
UnNamedNet118: C1250.1 D5.3 R546.1 R549.1 U424.20 | length 658.9
  BottomLayer w7: U424.20@1244.8,1646 1244.8,1693.8 1328,1777 1328,1875 1335,1882 1368,1882 C1250.1@1370,1884 1370,2010 1384,2024 1444,2024 1492,2072 D5.3@1492,2148
UnNamedNet119: C436.1 Q127.1 R1480.2 R2650.2 | length 1028.7
  MidLayer1 w7: v1(1454,1780) 1454,1777 1516,1715 1516,1499 1788,1227 1932,1227 v1(1933,1228)
  BottomLayer w7: R1480.2@1427,1776 1431,1780 1464,1780 1473,1771 1490,1771 C436.1@1495,1766
  BottomLayer w16: v1(1933,1228) 1941,1236 R2650.2@1941,1259 1973,1259 1983,1249 Q127.1@2019,1249
UnNamedNet120: C454.1 D405.3 R4870.1 U424.31 | length 529.4
  BottomLayer w7: U424.31@1384,1470.89 1551.11,1470.89 1577,1445 1577,1350 1594,1333 1788,1333 1792,1337 D405.3@1792,1344
UnNamedNet121: C437.1 R178.1 U424.32 | length 493.3
  BottomLayer w7: U424.32@1384,1451.2 1540.8,1451.2 1555,1437 1555,1260 1590,1225 1590,1199 1614,1175 R178.1@1644,1175
UnNamedNet122: C554.1 R561.2 U424.5 X2.1 | length 446.3
  BottomLayer w7: C554.1@701,1357 X2.1@701,1417 ; C554.1@703,1355 705,1353 730,1353 749,1372 805,1372 859,1426 921,1426 945.74,1450.74 U424.5@1048,1450.74
UnNamedNet123: C412.2 J104.12 R403.2 U424.4 | length 7010.2
  MidLayer3 w7: v1(899,1366) 1003,1366 1036,1333 1226,1333 1273,1380 1273,1456 1303,1486 1443,1486 1477,1452 1684,1452 1754,1522 1754,1667 1898,1811 1898,2692 1925,2719 1925,3038 1800,3163 1800,4625 1993,4818 1993,5614 2066,5687 2066,6319 2178,6431 2178,6508 2284,6614 2284,6793 2358,6867 J104.12@2358,6878
  BottomLayer w7: R403.2@857,1289 855,1291 855,1337 886,1368 913,1368 976.06,1431.06 U424.4@1048,1431.06
UnNamedNet124: C4330.2 Q413.1 R413.2 R469.2 | length 344
  BottomLayer w7: R413.2@999,1140 1016,1140 1058,1098 1058,979 1045,966 1045,931 1022,908 C4330.2@1019,908 1037,890 1037,860 R469.2@1034,857
UnNamedNet125: C534.2 Q424.1 R544.2 R545.2 | length 313.5
  BottomLayer w7: R544.2@876,1139 876,1138 909,1105 909,921 893,905 893,868 878,853 C534.2@877,853
UnNamedNet126: C184.2 C185.2 C448.2 D129.1 Q425.2 Q425.4 R146.2 R558.2 TP2.1 | length 2631.2
  TopLayer w16: v1(3114,1663) v1(3150,1663)
  MidLayer1 w7: v1(3114,1663) 3115,1664 3201,1664 3313,1776 3313,1933 3221,2025 v1(3213,2025)
  MidLayer2 w19: v1(1548,753) 1705,753 2329,1377 2894,1377 3117,1600 3117,1660 v1(3114,1663) v1(3150,1663)
  BottomLayer w8: R146.2@3180,2028 3210,2028 v1(3213,2025)
  other v1: 1585,753
UnNamedNet127: C551.2 Q425.1 R558.1 U433.1 | length 338.3
  BottomLayer w7: C551.2@1257,462 1257,432 1286,403 1286,358 1294,350 1388,350 1398,340 R558.1@1428,340 1442,354 Q425.1@1442,407
UnNamedNet128: C551.1 R550.2 R560.2 U433.2 | length 195.8
  BottomLayer w7: C551.1@1257,494 1276,494 1318,452 1370,452 R560.2@1373,449 1373,402 U433.2@1363,392
UnNamedNet129: C121.2 C125.2 D155.3 U110.11 | length 360.6
  BottomLayer w16: D155.3@2544,2388 2576,2420 2622,2420 2657,2455 2738,2455 2810,2527 U110.11@2847,2527
UnNamedNet130: C156.1 R566.2 R567.2 | length 269.7
  BottomLayer w49: 3733,3007 3724,2998 3724,2976 3671,3029 R567.2@3671,3042 R566.2@3752,3042 C156.1@3752,2976
UnNamedNet131: C154.1 C156.2 | length 66
  BottomLayer w45: C154.1@3752,2803 C156.2@3752,2869
UnNamedNet132: C157.2 R240.1 | length 59.4
  BottomLayer w16: C157.2@3426,2547 3450,2523 3474,2523 R240.1@3475,2522
UnNamedNet133: C119.1 R260.1 R491.1 U110.1 | length 483.5
  BottomLayer w6: C119.1@3150,2585 3150,2578 3188,2540 3190,2540
  BottomLayer w8: U110.1@3062,2577 3120,2577 3128,2585 C119.1@3150,2585 ; 3190,2540 3377,2540 3422,2495 3422,2461 R260.1@3423,2460 ; R491.1@3242,2584 3243,2583 3243,2541
UnNamedNet134: C535.1 Q423.3 U110.2 | length 561.1
  BottomLayer w8: U110.2@3062,2527 3123,2527 C535.1@3133,2537 3157,2537 3175,2519 3368,2519 3387,2500 3387,2307 3371,2291 Q423.3@3371,2290
UnNamedNet135: C100.2 R151.2 R1860.2 U110.4 | length 301.5
  BottomLayer w8: U110.4@3062,2427 3116,2427 3123,2420 3177,2420 C100.2@3183,2426
  BottomLayer w18: C100.2@3183,2426 3186,2426 3247,2365 3330,2365 R151.2@3332,2363
UnNamedNet136: C158.2 C160.1 | length 80.1
  BottomLayer w38: C158.2@3592,2187 3603,2187 3613,2177 C160.1@3668,2177
UnNamedNet137: C158.1 R564.1 R569.1 | length 171.7
  BottomLayer w38: C158.1@3592,2294 3592,2295 3627,2330 3665,2330 R569.1@3667,2332 3667,2411 R564.1@3666,2412
UnNamedNet138: C120.1 C174.1 R146.1 R148.1 R261.1 R318.1 U103.2 | length 508.2
  BottomLayer w8: R261.1@3175,1971 3147,1999 3147,2069 3165,2087 3202,2087 3216,2101 3216,2141 3248,2173 3288,2173 C174.1@3299,2162 3317,2162 3324,2155 3365,2155 R148.1@3366,2154 3366,2107 3363,2104 U103.2@3363,2050
UnNamedNet139: C174.2 R187.1 R2630.2 U103.1 | length 189.7
  BottomLayer w8: C174.2@3299,2130 3300,2129 3300,2024 3349,1975 U103.1@3363,1975
UnNamedNet140: C120.2 R2630.1 | length 50.1
  BottomLayer w7: R2630.1@3244,2070 3244,2113 C120.2@3249,2118
UnNamedNet141: C547.1 D144.1 R553.1 | length 281.5
  BottomLayer w38: C547.1@2742,1896 2737,1901 2737,2066 D144.1@2735,2068 2745,2078 2836,2078 R553.1@2837,2077
UnNamedNet142: C206.1 C213.1 | length 125.4
  BottomLayer w16: C213.1@3784,1522 3785,1523 C206.1@3909,1523
UnNamedNet143: R555.2 U107.1 U107.8 | length 351.6
  BottomLayer w7: R555.2@3118,3134 3119,3134 3133,3148 3133,3218 3154.23,3239.23 3154.23,3302.77 3130,3327 3130,3403 3154,3427 U107.1@3154,3450
UnNamedNet144: C155.2 R239.1 | length 54.5
  BottomLayer w16: R239.1@3512,3304 3511,3305 3511,3351 C155.2@3516,3356
UnNamedNet145: C162.2 C506.1 | length 92.4
  BottomLayer w35: C162.2@3578,3531 3579,3531 3621,3489 C506.1@3653,3489
UnNamedNet146: C162.1 R562.1 R563.1 | length 163.7
  BottomLayer w35: C162.1@3570,3640 3574,3644 R562.1@3652,3644 R563.1@3652,3724
UnNamedNet147: C3.1 C159.2 C161.2 C203.1 C505.2 C506.2 C1001.2 D138.2 D434.2 D436.2 J104.1 L100.2 Q111.2 Q112.2 Q113.3 Q114.3 R157.2 R158.2 R195.2 R564.2 R566.1 R567.1 R569.2 U108.3 U108.9 | length 13182.6
  TopLayer w28: v2(3045,3860) L100.2@2998,3760 ; v2(3065,3676) L100.2@2998,3760 ; v2(3080,3833) L100.2@2998,3760 ; v2(3093,3709) L100.2@2998,3760 ; v2(3100,3796) L100.2@2998,3760 ; v2(3106,3751) L100.2@2998,3760 ; Q112.2@3967,2319 3956,2330 v1(3895,2330) 3895,2305 v1(3896,2304) 3967,2304 Q112.2@3974,2311 ; Q111.2@3967,2997 3967,3032 3977,3042 4033,3042 4034,3043 4034,2955 4030,2951 3973,2951 3969,2955 3969,3008 Q111.2@3970,3009 ; Q111.2@3979,3025 4019,3025 4017,3023 4017,2961 4011,2967 3992,2967 3990,2969 Q111.2@3990,3019
  MidLayer1 w20: L100.2@3002,3768 v2(3065,3676) 2987,3749 v2(3093,3709) L100.2@2998,3760 ; v2(3045,3860) L100.2@2998,3760 ; 3917,2295 3927,2329 3897,2272 3928,2285 3935,2340 3917,2344 3905,2295 3959,2336 3950,2305 3907,2263 3882,2264 3874,2276 3872,2370 3879,2377 3891,2376 3922,2349 3961,2346 Q112.2@3967,2319 ; Q114.3@3951,4122 3916,4146 3905,4084 3896,4156 3957,4158 3966,4127 3987,4076 v1(3894,4073) v1(3882,4106) v1(3882,4143) v1(3895,4170) 3956,4170 3966,4160 Q114.3@3966,4122 ; Q111.2@4022,3008 Q111.2@4030,2993 ; 4030,2976 4040,3031 4039,2967 4022,2959 3992,3041 4044,3040 3977,2974 Q111.2@3939,3000 ; L100.2@2998,3760 v2(3106,3751) L100.2@2999,3751 ; L100.2@2998,3760 v2(3080,3833) L100.2@2999,3751 ; L100.2@2999,3751 v2(3100,3796) L100.2@2999,3751 ; Q111.2@3939,3000 3984,3054 4055,3052 4055,2960 4048,2952 3957,2954 Q111.2@3939,3000
  MidLayer1 w30: 3889,2274 3889,2356 3888,2357 3888,2349 v1@3899,2338
  MidLayer3 w18: v2(3045,3860) L100.2@2998,3760 v2(3080,3833) ; v1(3895,2330) 3923,2324 3963,2320 3902,2302 3900,2321 3894,2308 Q112.2@3933,2316
  MidLayer3 w20: v1(3882,4143) v1(3882,4106) 3895,4093 3895,4076 3901,4070 3947,4070 3987,4110 3949,4110 3902,4157 3893,4157 3888,4152 3888,4146 3903,4131 3903,4090 3895,4098 3895,4126 3908,4139 3908,4089 3928,4109 Q114.3@3945,4109 ; v1(3895,4170) 3912,4153 3964,4153 Q114.3@3971,4146
  MidLayer4 w13: J104.1@2358,6009 2359,6009 2437,5931 2437,5055 2678,4814 2844,4814 2961,4814
  MidLayer4 w20: v2(3045,3860) L100.2@2998,3760 v2(3080,3833) ; 3909,2316 v1(3895,2330) ; Q111.2@3944,3031 v1(4037,3046) v1(4034,2948) 3955,2961 3961,3018 4030,3035 4025,2960 4001,2976 Q111.2@4015,3016 ; v1(3895,2330) 3974,2313 v1(3896,2304) v1(3895,2330)
  MidLayer4 w30: 3839,4636 3852,4636 3875,4613 3875,4484 3874,4483
  BottomLayer w7: U108.3@2982,4567.18 3054.82,4567.18 U108.9@3067,4555 ; R195.2@2999,4805 2999,4755 C1001.2@2996,4752 3036,4752 v1(3037,4753)
  BottomLayer w16: C3.1@3029,4445 3160,4445 v1@3162,4443 ; R158.2@3404,3881 3404,3833 C159.2@3393,3822 3394,3823 3521,3823 D436.2@3554,3856 ; R157.2@3644,4534 3650,4540 3747,4540 D434.2@3756,4549 ; R567.1@3671,3149 3784,3149 3992,2941 4038,2941 4039,2942 4039,3041 4042,3044 Q111.2@3960,3044 ; C161.2@3756,4489 D434.2@3756,4549 ; v1(3807,4551) 3804,4548 3757,4548 D434.2@3756,4549
  BottomLayer w18: v2(3045,3860) L100.2@2998,3760 ; v2(3065,3676) 2977,3771 v2(3093,3709) ; v2(3080,3833) L100.2@2998,3760 ; v2(3100,3796) L100.2@2998,3760 ; v2(3106,3751) L100.2@2998,3760
  BottomLayer w30: U108.9@3067,4555 3055,4567 3055,4595 3115,4655 3115,4676 3118,4679 3135,4679 3139,4675 3139,4646 3133,4640 3107,4640 3078,4611 U108.9@3078,4576 ; 3817,4143 3930,4143 Q114.3@3945,4128 ; 3837,4123 3942,4123 3950,4115 3941,4115 3925,4099 3865,4099 3862,4102 3881,4102 3901,4082 ; Q114.3@3966,4121 3927,4160 3762,4160 C505.2@3751,4149 3751,4141 3754,4138 3805,4138 3875,4068 3896,4068 3904,4076 3929,4076 Q114.3@3970,4117
  BottomLayer w35: C506.2@3752,3486 3758,3480 3837,3480 3888,3429 Q113.3@3988,3429 ; C506.2@3760,3489 3760,3500 3763,3503 3791,3503 3813,3481 3955,3481 Q113.3@3976,3460 ; v1@3878,3457 Q113.3@3973,3457
  BottomLayer w38: 3906,2327 3917,2316 Q112.2@3978,2316 ; Q112.2@3977,2289 3904,2289 3867,2326 3778,2326 3773,2331 R564.2@3773,2412 3773,2381 3805,2349 3958,2349 Q112.2@3982,2325
  other v1: 3883,3427 3879,3463 3893,3498 3458,3823 3154,4446 3097,4638 3133,4638
UnNamedNet148: C159.1 R241.2 | length 54.5
  BottomLayer w16: C159.1@3339,3822 3339,3868 R241.2@3345,3874
UnNamedNet149: C505.1 R565.2 R568.2 | length 172.8
  BottomLayer w18: R565.2@3482,4175 3564,4175 3590,4149 C505.1@3644,4149
UnNamedNet150: C165.1 R565.1 R568.1 | length 181.5
  BottomLayer w18: R565.1@3482,4282 3559,4282 3601,4324 3631,4324 3636,4319 C165.1@3644,4319
UnNamedNet151: C161.1 R248.2 | length 178.4
  BottomLayer w16: R248.2@3529,4502 3541,4490 3701,4490 C161.1@3702,4489
UnNamedNet152: C3.2 C203.2 R103.2 R554.2 U108.6 | length 1424.6
  MidLayer3 w13: v1(3192,4349) 3192,4424 3220,4452 v1(3220,4556)
  BottomLayer w7: U108.6@3154,4567.41 3208.59,4567.41 v1(3220,4556)
  BottomLayer w16: C3.2@3037,4381 3112,4381 3144,4349 v1(3192,4349) ; R103.2@3040,3498 3047,3505 3047,3553 3196,3702 3196,4392 3195,4393 R554.2@3195,4400
UnNamedNet153: C1001.1 D138.1 R195.1 R281.1 U108.2 U108.4 | length 448.1
  BottomLayer w7: R281.1@2942,4856 2942,4728 2991,4679 D138.1@2991,4677 2982,4668 U108.4@2982,4592.77 2930.77,4592.77 2923,4585 2923,4548 2929.41,4541.59 U108.2@2982,4541.59
UnNamedNet154: J104.2 R281.2 | length 1935.8
  MidLayer4 w13: J104.2@2358,6088 2358,6083 2303,6028 2303,5991 2336,5958 2375,5958 2416,5917 2416,5041 2668,4789 3019,4789 v1(3036,4806)
  BottomLayer w7: R281.2@3000,4856 3036,4820 v1(3036,4806)
UnNamedNet155: R554.1 U108.1 U108.8 | length 275.1
  BottomLayer w7: U108.1@2982,4516 2982,4499 2992,4489 3153,4489 3156,4492 ; U108.8@3154,4516.23 3156,4514.23 3156,4492 ; R554.1@3195,4458 3195,4459 3162,4492 3156,4492
UnNamedNet156: R223.1 R233.1 U108.7 | length 563.9
  BottomLayer w7: U108.7@3154,4541.82 3191.18,4541.82 3218,4515
  BottomLayer w16: 3218,4515 3218,4503 3292,4429 3292,4294 3347,4239 3347,4152 3310,4115 R233.1@3290,4115
UnNamedNet157: R224.2 R232.2 U108.5 | length 236.7
  BottomLayer w7: U108.5@3154,4593 3232,4593
  BottomLayer w16: 3232,4593 3290,4535 3361,4535 R232.2@3365,4531
UnNamedNet158: D122.1 R224.1 | length 267.5
  BottomLayer w16: R224.1@3285,4641 3285,4633 3329,4589 3429,4589 3451,4567 3451,4515 D122.1@3441,4505
UnNamedNet159: D122.2 LB116.1 R232.1 | length 161.8
  BottomLayer w16: R232.1@3365,4638 3524,4638 LB116.1@3526,4636